# EAGLE board multiplexor.job (EAGLE 6.1)

Size 100 x 80 mm. Coordinates in mm from the lower left corner, seen from the top.
Outline: 0,0 100,0 100,80 0,80 0,0
Copper layers (1*16): Top 0.035mm / dielectric 1.5mm / Bottom 0.035mm
Design rules: minimum track width 10mil, minimum drill 32mil, track to track 12mil, track to pad 12mil, pad to pad 12mil, via to via 12mil, smd to smd 8mil, copper to edge 40mil, drill to drill 40mil, minimum pad ring 10mil, minimum via ring 8mil, stop-mask expansion 4mil, vias tented up to drill 0mil, thermal gap 14mil

## Footprints (pad centres in the part's own frame; a part is rotated, then mirrored left to right if it is on the bottom)
SO16 = smd 0.66 x 2.032: 1 -4.445,-3.073; 2 -3.175,-3.073; 3 -1.905,-3.073; 4 -0.635,-3.073; 5 0.635,-3.073; 6 1.905,-3.073; 7 3.175,-3.073; 8 4.445,-3.073; 9 4.445,3.073; 10 3.175,3.073; 11 1.905,3.073; 12 0.635,3.073; 13 -0.635,3.073; 14 -1.905,3.073; 15 -3.175,3.073; 16 -4.445,3.073
DIL16 = drill 0.813 long: 1 -8.89,-3.81; 2 -6.35,-3.81; 3 -3.81,-3.81; 4 -1.27,-3.81; 5 1.27,-3.81; 6 3.81,-3.81; 7 6.35,-3.81; 8 8.89,-3.81; 9 8.89,3.81; 10 6.35,3.81; 11 3.81,3.81; 12 1.27,3.81; 13 -1.27,3.81; 14 -3.81,3.81; 15 -6.35,3.81; 16 -8.89,3.81
2X07 = drill 1.016 octagon: 1 -7.62,-1.27; 2 -7.62,1.27; 3 -5.08,-1.27; 4 -5.08,1.27; 5 -2.54,-1.27; 6 -2.54,1.27; 7 0,-1.27; 8 0,1.27; 9 2.54,-1.27; 10 2.54,1.27; 11 5.08,-1.27; 12 5.08,1.27; 13 7.62,-1.27; 14 7.62,1.27
2X03 = drill 1.016 octagon: 1 -2.54,-1.27; 2 -2.54,1.27; 3 0,-1.27; 4 0,1.27; 5 2.54,-1.27; 6 2.54,1.27
DIL08 = drill 0.813 offset: 1 -3.81,-3.81; 2 -1.27,-3.81; 3 1.27,-3.81; 4 3.81,-3.81; 5 3.81,3.81; 6 1.27,3.81; 7 -1.27,3.81; 8 -3.81,3.81
R1206 = smd 1.6 x 1.803: 1 -1.422,0; 2 1.422,0

## Placement (x,y rotation side)
IC1  4051D  [SO16]  29.21,19.05 0 top
IC2  4051D  [SO16]  43.18,19.05 0 top
IC3  74LS595N  [DIL16]  38.1,31.75 0 top
JP1  [2X07]  55.88,22.86 270 top
JP2  [2X03]  13.97,30.48 270 top
OK1  6N137  [DIL08]  43.18,43.18 270 top
OK2  6N137  [DIL08]  27.94,43.18 270 top
OK3  6N137  [DIL08]  12.7,43.18 270 top
R1  [R1206]  20.32,29.21 270 top
R2  [R1206]  24.13,29.21 90 top
R3  [R1206]  8.89,31.75 90 top
R4  [R1206]  13.97,22.86 270 top
R5  [R1206]  16.51,22.86 270 top
R6  [R1206]  22.86,34.29 180 top
R7  [R1206]  13.97,17.78 90 top
R8  [R1206]  16.51,17.78 90 top
R9  [R1206]  74.93,25.4 0 top
R10  [R1206]  74.93,20.32 0 top
R11  [R1206]  74.93,15.24 0 top
R12  [R1206]  74.93,10.16 0 top

## Library data of the parts
IC1 IC2 = 40xx
IC3 = 74xx-eu
JP1 JP2 = pinhead
OK1-OK3 = optocoupler; MPN: 6N137; OC_FARNELL: 1328376; OC_NEWARK: 52M1895
R1-R12 = resistor

## Nets
+5V: JP2.1
+6V: IC3.10 OK1.2 OK1.8 OK2.2 OK2.8 OK3.2 OK3.8 R4.2 R5.2 R6.2 R7.2 R8.2
GND: IC1.8 IC2.8 IC3.8 JP2.4 OK1.5 OK2.5 OK3.5
GNDA: IC3.13
N$1: IC1.6 IC3.15 R7.1
N$2: IC1.11 IC3.1
N$3: IC1.10 IC3.2
N$4: IC1.9 IC3.3
N$5: IC2.6 IC3.4 R8.1
N$6: IC2.11 IC3.5
N$7: IC2.10 IC3.6
N$8: IC2.9 IC3.7
N$9: IC1.3 IC2.3
N$10: IC1.13 JP1.1
N$11: IC1.14 JP1.3
N$12: IC1.15 JP1.5
N$13: IC1.12 JP1.7
N$14: IC1.1 JP1.9
N$15: IC1.5 JP1.11
N$16: IC1.2 JP1.13
N$17: OK1.3 R1.2
N$18: OK2.3 R2.2
N$19: OK3.3 R3.2
N$20: IC3.14 OK1.6 R4.1
N$21: IC3.11 OK2.6 R5.1
N$22: IC3.12 OK3.6 R6.1
N$23: JP2.2 R1.1
N$24: JP2.3 R2.1
N$25: JP2.5 R3.1
VCC: IC1.16 IC2.16 IC3.16
VEE: IC1.7 IC2.7

## Tracks (layer width: path | path; a pad name or v marks a point on that pad's centre or on a via)
+6V  (11 unrouted)
GND  (6 unrouted)
N$1  (2 unrouted)
N$2  (1 unrouted)
N$3  (1 unrouted)
N$4  (1 unrouted)
N$5  (2 unrouted)
N$6  (1 unrouted)
N$7  (1 unrouted)
N$8  (1 unrouted)
N$9  (1 unrouted)
N$10  (1 unrouted)
N$11  (1 unrouted)
N$12  (1 unrouted)
N$13  (1 unrouted)
N$14  (1 unrouted)
N$15  (1 unrouted)
N$16  (1 unrouted)
N$17  (1 unrouted)
N$18  (1 unrouted)
N$19  (1 unrouted)
N$20  (2 unrouted)
N$21  (2 unrouted)
N$22  (2 unrouted)
N$23  (1 unrouted)
N$24  (1 unrouted)
N$25  (1 unrouted)
VCC  (2 unrouted)
VEE  (1 unrouted)